# Altium PCB inout.PcbDoc
Units mm, origin at the board's own origin, x right, y up, seen from the top; angles counter-clockwise.
Board outline 65 x 57 mm, 2 copper layers (Top Layer, Bottom Layer); 72 components, 105 nets, 314 pads, 7 vias.
Unrouted connection lines stored in the file: 126.
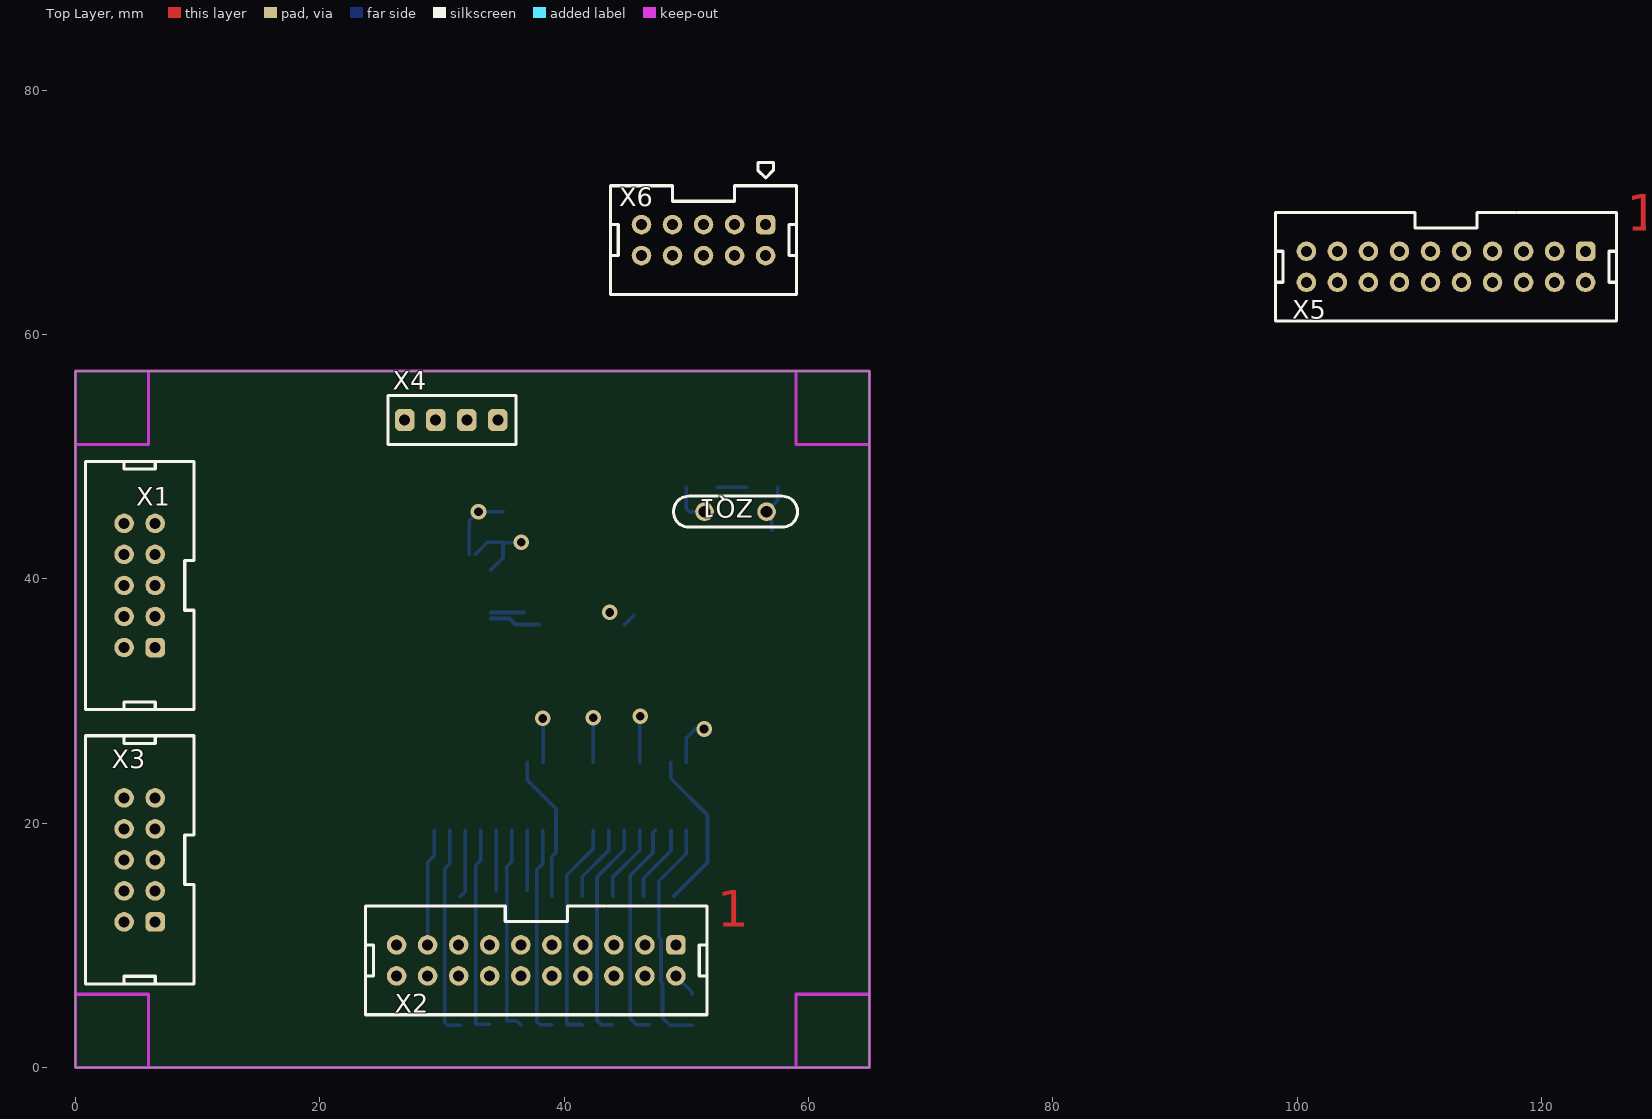
[diagram p0: Top Layer view]
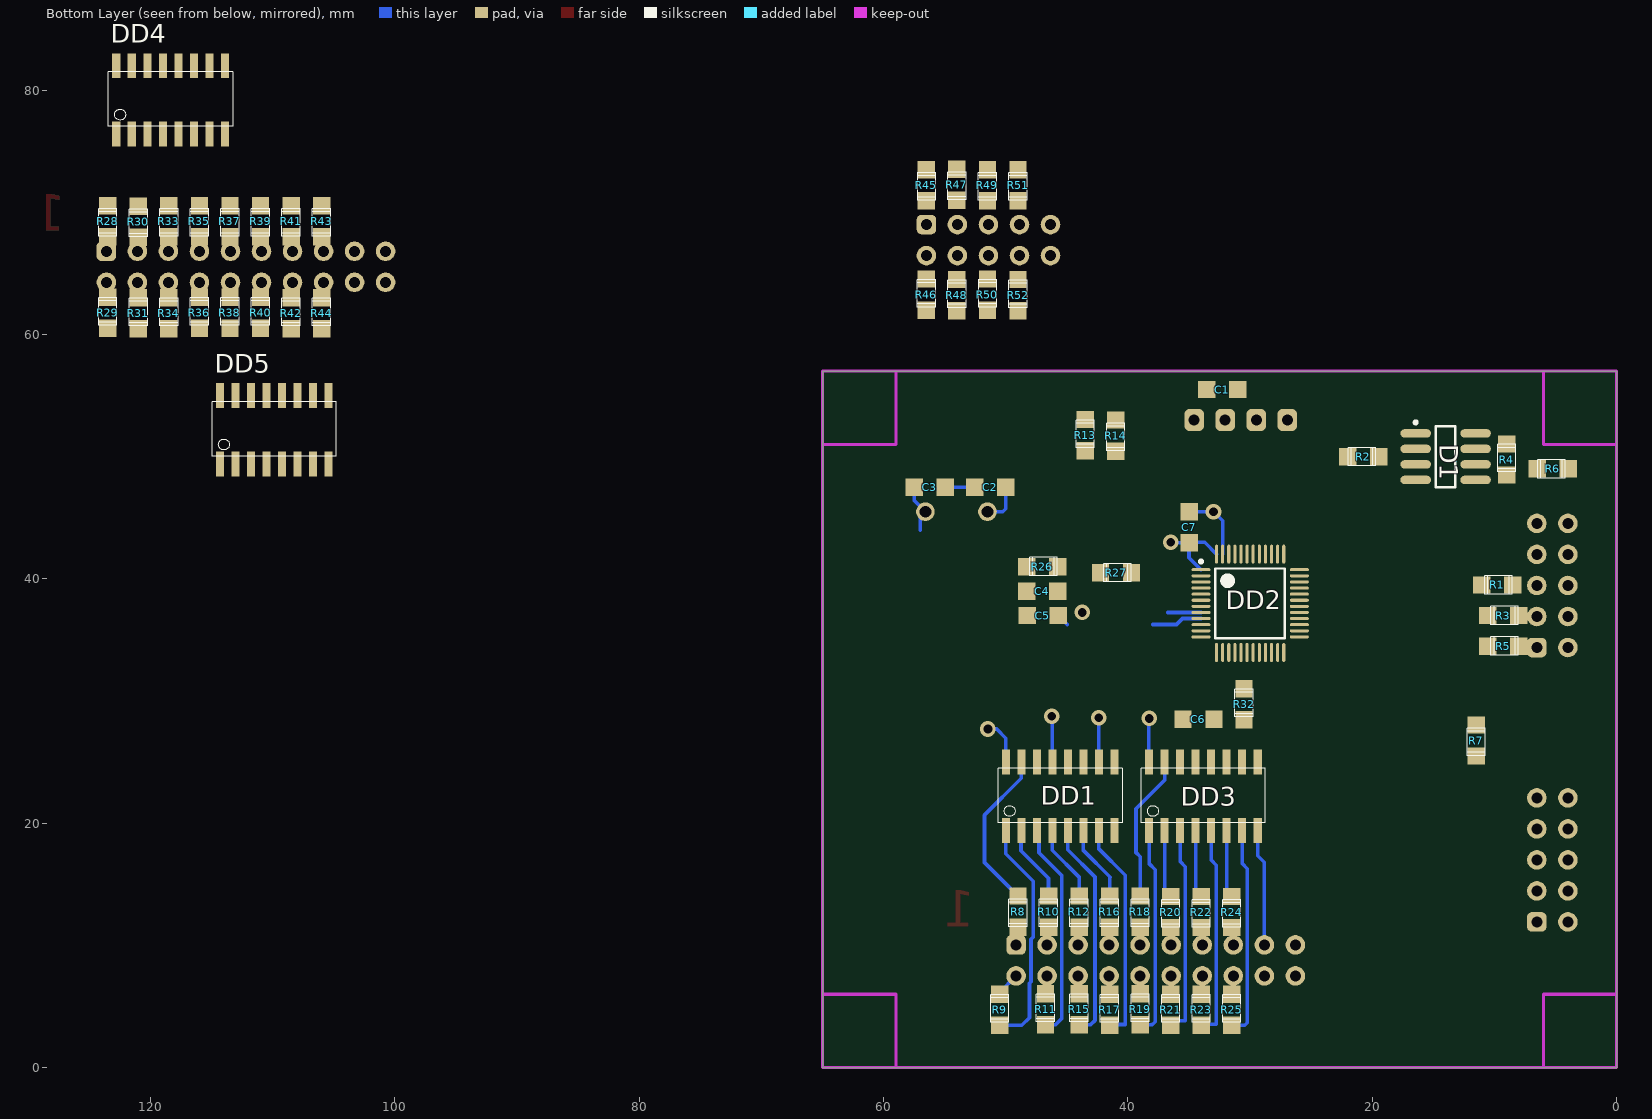
[diagram p1: Bottom Layer view, seen from below]

## Layer stack, top to bottom
Top Layer: signal copper 0.0356
Dielectric: dielectric 0.32, FR-4, Dk 4.8
Bottom Layer: signal copper 0.0356

## Board outline
0,0 65,0 65,57 0,57

## Design rules (kind name [scope] priority, off if disabled: settings)
Clearance [All] p1: gap=0.2
PolygonConnect [All] p1: connectstyle=Relief reliefconductorwidth=0.254 reliefentries=4 polygonreliefangle="90 Angle" airgapwidth=0.254
RoutingVias [All] p1: holewidth=0.711 width=1.27 viastyle="Through Hole" minholewidth=0.711 minwidth=1.27 maxholewidth=0.711 maxwidth=1.27
SolderMaskExpansion [All] p1: expansion=0.102
Width [All] p1: maxlimit=1 minlimit=0.3 preferedwidth=0.3
28 further rules are at their usual default settings.

## Components (designator, comment, footprint, x,y, rotation, side; value= is the part's Value field where it differs from the comment)
C1 "CAP0805" CC0805 33.54,55.5 r180 bottom
C2 "CAP0805" CC0805 50,47.5 r0 bottom
C3 "CAP0805" CC0805 57.5,47.5 r180 bottom
C4 "CAP0805" CC0805 48.29,39 r180 bottom
C5 "CAP0805" CC0805 48.25,37 r180 bottom
C6 "CAP0805" CC0805 35.5,28.5 r180 bottom
C7 "CAP0805" CC0805 35,45.5 r270 bottom
D1 "SN65HVD78" 8S1_M 14,50 r180 bottom
DD1 "74HC595(SOIC)" SO16 50,19.412 r90 bottom
DD2 "STM32F373x(LQFP48)" LQFP48_L 30,38 r180 bottom
DD3 "74HC595(SOIC)" SO16 38.27,19.412 r90 bottom
DD4 "74HC595(SOIC)" SO16 122.81,76.412 r90 bottom
DD5 "74HC595(SOIC)" SO16 114.31,49.412 r90 bottom
R1 "1K 1% 0805(2012)" RC0805 8.5,39.5 r0 bottom
R2 "1K 1% 0805(2012)" RC0805 22,50 r180 bottom
R3 "1K 1% 0805(2012)" RC0805 8,37 r0 bottom
R4 "1K 1% 0805(2012)" RC0805 9,51.04 r270 bottom
R5 "1K 1% 0805(2012)" RC0805 8,34.5 r0 bottom
R6 "1K 1% 0805(2012)" RC0805 6.5,49 r180 bottom
R7 "1K 1% 0805(2012)" RC0805 11.5,25.5 r90 bottom
R8 "1K 1% 0805(2012)" RC0805 49,11.5 r90 bottom
R9 "1K 1% 0805(2012)" RC0805 50.5,6 r270 bottom
R10 "1K 1% 0805(2012)" RC0805 46.5,11.5 r90 bottom
R11 "1K 1% 0805(2012)" RC0805 46.75,6.04 r270 bottom
R12 "1K 1% 0805(2012)" RC0805 44,11.5 r90 bottom
R13 "RES0805" RC0805 43.5,53.04 r270 bottom
R14 "RES0805" RC0805 41,50.46 r90 bottom
R15 "1K 1% 0805(2012)" RC0805 44,6.04 r270 bottom
R16 "1K 1% 0805(2012)" RC0805 41.5,11.5 r90 bottom
R17 "1K 1% 0805(2012)" RC0805 41.5,6 r270 bottom
R18 "1K 1% 0805(2012)" RC0805 39,11.5 r90 bottom
R19 "1K 1% 0805(2012)" RC0805 39,6.04 r270 bottom
R20 "1K 1% 0805(2012)" RC0805 36.5,11.46 r90 bottom
R21 "1K 1% 0805(2012)" RC0805 36.5,6 r270 bottom
R22 "1K 1% 0805(2012)" RC0805 34,11.46 r90 bottom
R23 "1K 1% 0805(2012)" RC0805 34,6 r270 bottom
R24 "1K 1% 0805(2012)" RC0805 31.5,11.46 r90 bottom
R25 "1K 1% 0805(2012)" RC0805 31.5,6 r270 bottom
R26 "RES0805" RC0805 45.75,41 r0 bottom
R27 "RES0805" RC0805 39.71,40.5 r0 bottom
R28 "1K 1% 0805(2012)" RC0805 123.5,68 r90 bottom
R29 "1K 1% 0805(2012)" RC0805 123.5,63.04 r270 bottom
R30 "1K 1% 0805(2012)" RC0805 121,67.96 r90 bottom
R31 "1K 1% 0805(2012)" RC0805 121,63 r270 bottom
R32 "RES0805" RC0805 30.5,31 r270 bottom
R33 "1K 1% 0805(2012)" RC0805 118.5,68 r90 bottom
R34 "1K 1% 0805(2012)" RC0805 118.5,63 r270 bottom
R35 "1K 1% 0805(2012)" RC0805 116,68 r90 bottom
R36 "1K 1% 0805(2012)" RC0805 116,63.04 r270 bottom
R37 "1K 1% 0805(2012)" RC0805 113.5,68 r90 bottom
R38 "1K 1% 0805(2012)" RC0805 113.5,63.04 r270 bottom
R39 "1K 1% 0805(2012)" RC0805 111,68 r90 bottom
R40 "1K 1% 0805(2012)" RC0805 111,63.04 r270 bottom
R41 "1K 1% 0805(2012)" RC0805 108.5,68 r90 bottom
R42 "1K 1% 0805(2012)" RC0805 108.5,63 r270 bottom
R43 "1K 1% 0805(2012)" RC0805 106,68 r90 bottom
R44 "1K 1% 0805(2012)" RC0805 106,63 r270 bottom
R45 "1K 1% 0805(2012)" RC0805 56.5,70.96 r90 bottom
R46 "1K 1% 0805(2012)" RC0805 56.5,64.54 r270 bottom
R47 "1K 1% 0805(2012)" RC0805 54,71 r90 bottom
R48 "1K 1% 0805(2012)" RC0805 54,64.5 r270 bottom
R49 "1K 1% 0805(2012)" RC0805 51.5,70.96 r90 bottom
R50 "1K 1% 0805(2012)" RC0805 51.5,64.54 r270 bottom
R51 "1K 1% 0805(2012)" RC0805 49,70.96 r90 bottom
R52 "1K 1% 0805(2012)" RC0805 49,64.5 r270 bottom
X1 "IDC10" IDC10M 6.54,34.38 r270 top
X2 "idc20" IDC20M 49.16,10.04 r0 top
X3 "IDC10" IDC10M 6.54,11.92 r270 top
X4 "*" 4pin 34.58,53 r180 top
X5 "idc20" IDC20M 123.62,66.815 r0 top
X6 "IDC10" IDC10M 56.5,69 r0 top
ZQ1 "REZONATOR" CRYSTAL_Primary 56.58,45.5 r180 top

## Footprints (in the part's own frame and the unit in brackets; to place one, negate y for a bottom-side part, rotate by r counter-clockwise, add the part's x,y. Pads: shape width x height; smd on the part's side, far side on the other; paste and mask are expansions set on the pad)
4pin [mm]
  rrect50% 1.6x1.8 hole 0.9: 1(0,0) 2(2.54,0) 3(5.08,0) 4(7.62,0)
  silkscreen extent -1.5,-2 9,2
8S1_M [mm] "SOIC, 8-Leads, Body 4.9x3.9mm, Pitch 1.27mm, IPC Low Density"
  oval 2.5x0.7 smd: 1(-2.45,1.905) 2(-2.45,0.635) 3(-2.45,-0.635) 4(-2.45,-1.905) 5(2.45,-1.905) 6(2.45,-0.635) 7(2.45,0.635) 8(2.45,1.905)
  silkscreen extent -2.58,-2.5 0.8,2.93, body extent -2,-2.5 2,2.5, height 1.75
CC0805 [mil]
  rect 56x56 smd: 1(0,0) 2(100,0)
CRYSTAL_Primary [mil]
  round 60 hole 38: 1(0,0) 2(200,0)
  silkscreen extent -100,-50 300,50
IDC10M [mm]
  rrect50% 1.6x1.6 hole 0.9: 1(0,0)
  round 1.6 hole 0.9: 2(0,-2.54) 3(-2.54,0) 4(-2.54,-2.54) 5(-5.08,0) 6(-5.08,-2.54) 7(-7.62,0) 8(-7.62,-2.54) 9(-10.16,0) 10(-10.16,-2.54)
  silkscreen extent -15.24,-5.72 5.08,3.18
IDC20M [mm]
  rrect50% 1.6x1.6 hole 0.9: 1(0,0)
  round 1.6 hole 0.9: 2(0,-2.54) 3(-2.54,0) 4(-2.54,-2.54) 5(-5.08,0) 6(-5.08,-2.54) 7(-7.62,0) 8(-7.62,-2.54) 9(-10.16,0) 10(-10.16,-2.54) 11(-12.7,0) 12(-12.7,-2.54) 13(-15.24,0) 14(-15.24,-2.54) 15(-17.78,0) 16(-17.78,-2.54) 17(-20.32,0) 18(-20.32,-2.54) 19(-22.86,0) 20(-22.86,-2.54)
  silkscreen extent -25.4,-5.71 2.54,3.17
LQFP48_L [mm] "Thin QFP, 48-Leads, Body 7x7mm, Pitch 0.5mm, IPC High Density"
  oval 1.55x0.25 smd: 1(-4.025,2.75) 2(-4.025,2.25) 3(-4.025,1.75) 4(-4.025,1.25) 5(-4.025,0.75) 6(-4.025,0.25) 7(-4.025,-0.25) 8(-4.025,-0.75) 9(-4.025,-1.25) 10(-4.025,-1.75) 11(-4.025,-2.25) 12(-4.025,-2.75) 25(4.025,-2.75) 26(4.025,-2.25) 27(4.025,-1.75) 28(4.025,-1.25) 29(4.025,-0.75) 30(4.025,-0.25) 31(4.025,0.25) 32(4.025,0.75) 33(4.025,1.25) 34(4.025,1.75) 35(4.025,2.25) 36(4.025,2.75)
  oval 0.25x1.55 smd: 13(-2.75,-4.025) 14(-2.25,-4.025) 15(-1.75,-4.025) 16(-1.25,-4.025) 17(-0.75,-4.025) 18(-0.25,-4.025) 19(0.25,-4.025) 20(0.75,-4.025) 21(1.25,-4.025) 22(1.75,-4.025) 23(2.25,-4.025) 24(2.75,-4.025) 37(2.75,4.025) 38(2.25,4.025) 39(1.75,4.025) 40(1.25,4.025) 41(0.75,4.025) 42(0.25,4.025) 43(-0.25,4.025) 44(-0.75,4.025) 45(-1.25,4.025) 46(-1.75,4.025) 47(-2.25,4.025) 48(-2.75,4.025)
  silkscreen extent -4.15,-2.85 2.85,3.55, body extent -3.5,-3.5 3.5,3.5, height 1.6
RC0805 [mil]
  rect 56x56 smd: 1(0,0) 2(100,0)
  silkscreen extent 2,-30 90,30
SO16 [mil]
  rect 80x26 smd: 1(0,0) 2(0,-50) 3(0,-100) 4(0,-150) 5(0,-200) 6(0,-250) 7(0,-300) 8(0,-350) 9(220,-350) 10(220,-300) 11(220,-250) 12(220,-200) 13(220,-150) 14(220,-100) 15(220,-50) 16(220,0)
  silkscreen extent 25,-375 200,25

## Part data
R1 R2 R3 R4 R5 R6 R7 R8 R9 R10 R11 R12 R15 R16 R17 R18 R19 R20 R21 R22 R23 R24 R25 R28 R29 R30 R31 R33 R34 R35 R36 R37 R38 R39 R40 R41 R42 R43 R44 R45 R46 R47 R48 R49 R50 R51 R52: library part RES0805, "RES0805"
X4: library part 4pin

## Via types
v1: diameter 1.27, hole 0.711, Top Layer to Bottom Layer, 7 vias

## Nets (pads, with @x,y where several pads share a name; then routed paths per layer and width w, separated by ;. In a path a pad name is that pad's centre, name@x,y a point inside that pad or via, vN(x,y) a via of type N, cw(c..) or ccw(c..) an arc to the next point about the centre after c; other vN are vias at no path point)
0V: C1.2 C2.2 C3.2 C4.1 C5.1 C6.1 C7.1 D1.5 DD1.8 DD1.13 DD2.8 DD2.23 DD2.47 DD3.8 DD3.13 DD4.8 DD4.13 DD5.8 DD5.13 R6.2 R13.2 X1.2 X1.4 X1.6 X1.8 X1.9 X1.10 X2.17 X2.18 X2.19 X2.20 X3.2 X3.4 X3.6 X3.8 X3.9 X3.10 X4.3 X5.17 X5.18 X5.19 X5.20 X6.9 X6.10 | length 24.8
  Bottom Layer w0.3: X2.17 28.84,16.8 29.38,17.34 DD3.8 ; DD2.47 32.25,44.75 v1(33,45.5) C7.1 ; DD2.8 36,37.25 ; 36,37.25 35.75,37.25 36.75,37.25 ; DD1.13 46.19,28.69 v1(46.25,28.75) ; C2.2 C3.2
  other v1: 43.75,37.25
3P3V: C1.1 C7.2 D1.8 DD1.10 DD1.16 DD2.1 DD2.17 DD2.48 DD3.10 DD3.16 DD4.10 DD4.16 DD5.10 DD5.16 R1.1 R2.1 R7.2 R14.2 R26.2 R32.1 X4.1 | length 18
  Bottom Layer w0.3: DD2.48 33.725,43 34.96,43 C7.2 ; DD2.1 35,41.725 C7.2 ; v1(36.5,43) 36.46,42.96 C7.2 ; v1(38.25,28.577) 38.303,28.524 38.303,25.033 DD3.16 ; v1@42.25,28.75 v1(42.38,28.62) DD1.10 ; DD1.16 50,26.962 50.749,27.711 v1(51.46,27.711)
3P3VA: C5.2 C6.2 DD2.9 DD2.24 DD2.25 R32.2 | length 5.2
  Bottom Layer w0.3: DD2.9 35.543,36.75 36.028,36.265 37.975,36.265 ; 44.975,36.265 C5.2
A_485: R5.1 X1.1 X3.1
B_485: R3.1 X1.3 X3.3
NetC2_1: C2.1 DD2.5 ZQ1.2 | length 3.4
  Bottom Layer w0.3: C2.1 50,45.75 50.25,45.5 ZQ1.2
NetC3_1: C3.1 R27.2 ZQ1.1 | length 4.1
  Bottom Layer w0.3: 57,44 57,45.08 ZQ1.1 57.5,46.42 C3.1
NetC4_2: C4.2 DD2.7 R26.1
NetD1_6: D1.6 R4.2 R5.2 R6.1
NetD1_7: D1.7 R1.2 R3.2 R4.1
NetDD1_9: DD1.9 DD3.14
NetDD2_6: DD2.6 R27.1
NetDD2_44: DD2.44 R13.1 R14.1
NetDD3_9: DD3.9 DD4.14
NetDD4_9: DD4.9 DD5.14
NetR8_1: R8.1 X2.1
NetR9_1: R9.1 X2.2 | length 2.1
  Bottom Layer w0.3: X2.2 50.5,6.16 R9.1
NetR10_1: R10.1 X2.3
NetR11_1: R11.1 X2.4
NetR12_1: R12.1 X2.5
NetR15_1: R15.1 X2.6
NetR16_1: R16.1 X2.7
NetR17_1: R17.1 X2.8
NetR18_1: R18.1 X2.9
NetR19_1: R19.1 X2.10
NetR20_1: R20.1 X2.11
NetR21_1: R21.1 X2.12
NetR22_1: R22.1 X2.13
NetR23_1: R23.1 X2.14
NetR24_1: R24.1 X2.15
NetR25_1: R25.1 X2.16
NetR28_1: R28.1 X5.1
NetR29_1: R29.1 X5.2
NetR30_1: R30.1 X5.3
NetR31_1: R31.1 X5.4
NetR33_1: R33.1 X5.5
NetR34_1: R34.1 X5.6
NetR35_1: R35.1 X5.7
NetR36_1: R36.1 X5.8
NetR37_1: R37.1 X5.9
NetR38_1: R38.1 X5.10
NetR39_1: R39.1 X5.11
NetR40_1: R40.1 X5.12
NetR41_1: R41.1 X5.13
NetR42_1: R42.1 X5.14
NetR43_1: R43.1 X5.15
NetR44_1: R44.1 X5.16
NetR45_1: R45.1 X6.1
NetR46_1: R46.1 X6.2
NetR47_1: R47.1 X6.3
NetR48_1: R48.1 X6.4
NetR49_1: R49.1 X6.5
NetR50_1: R50.1 X6.6
NetR51_1: R51.1 X6.7
NetR52_1: R52.1 X6.8
PB1: DD1.15 R8.2 | length 13.4
  Bottom Layer w0.3: DD1.15 48.73,23.685 51.75,20.665 51.75,16.79 R8.2
PB2: DD1.1 R9.2 | length 19.1
  Bottom Layer w0.3: DD1.1 50,17.5 47.75,15.25 47.75,10.689 47.939,10.5 47.939,7.019 48.061,6.896 48.061,4.085 48.686,3.46 R9.2
PB3: DD1.2 R10.2 | length 6.3
  Bottom Layer w0.3: R10.2 46.5,15.487 48.75,17.737 48.75,19.392 DD1.2
PB4: DD1.3 R11.2 | length 18
  Bottom Layer w0.3: R11.2@47,3.5 45.928,3.5 45.415,4.013 45.415,15.723 47.281,17.589 47.281,19.233 DD1.3
PB5: DD1.4 R12.2 | length 6.3
  Bottom Layer w0.3: R12.2 44,15.603 46.19,17.793 DD1.4
PB6: DD1.5 R15.2 | length 17.9
  Bottom Layer w0.3: R15.2 43.058,3.5 42.697,3.861 42.697,15.596 44.92,17.818 DD1.5
PB7: DD1.6 R16.2 | length 6.3
  Bottom Layer w0.3: R16.2 41.5,15.523 41.453,15.57 43.65,17.767 DD1.6
PB8: DD1.7 R17.2 | length 18.1
  Bottom Layer w0.3: R17.2 41.429,3.531 40.234,3.531 40.234,15.748 42.38,17.894 DD1.7
PB9: DD3.15 R18.2 | length 12.1
  Bottom Layer w0.3: DD3.15 37,23.528 39.345,21.184 39.345,17.602 39,17.258 R18.2
PB10: DD3.1 R19.2 | length 17.2
  Bottom Layer w0.3: DD3.1 38.27,16.696 37.77,16.195 37.77,3.759 38.029,3.5 R19.2
PB11: DD3.2 R20.2 | length 4.9
  Bottom Layer w0.3: R20.2@37,14.5 DD3.2
PB12: DD3.3 R21.2 | length 17.1
  Bottom Layer w0.3: DD3.3 35.73,16.858 35.306,16.434 35.306,3.835 36.125,3.835 R21.2
PB13: DD3.4 R22.2 | length 5
  Bottom Layer w0.3: R22.2@34.46,14.46 DD3.4
PB14: DD3.5 R23.2 | length 17.2
  Bottom Layer w0.3: DD3.5 33.19,16.985 32.77,16.565 32.77,3.552 R23.2@33.908,3.552
PB15: DD3.6 R24.2 | length 5.6
  Bottom Layer w0.3: R24.2 31.92,14.42 DD3.6
PB16: DD3.7 R25.2 | length 17.3
  Bottom Layer w0.3: DD3.7 30.65,16.696 30.23,16.276 30.23,3.662 30.432,3.46 R25.2
PC1: DD4.15 R28.2
PC2: DD4.1 R29.2
PC3: DD4.2 R30.2
PC4: DD4.3 R31.2
PC5: DD4.4 R33.2
PC6: DD4.5 R34.2
PC7: DD4.6 R35.2
PC8: DD4.7 R36.2
PC9: DD5.15 R37.2
PC10: DD5.1 R38.2
PC11: DD5.2 R39.2
PC12: DD5.3 R40.2
PC13: DD5.4 R41.2
PC14: DD5.5 R42.2
PC15: DD5.6 R43.2
PC16: DD5.7 R44.2
PD1: R45.2
PD2: R46.2
PD3: R47.2
PD4: R48.2
PD5: R49.2
PD6: R50.2
PD7: R51.2
PD8: R52.2
SPI3_MISO: DD2.12
SPI3_MOSI: DD1.14 DD2.13
SPI3_SCK: DD1.11 DD2.11 DD3.11 DD4.11 DD5.11
SPI_LOCK: DD1.12 DD2.10 DD3.12 DD4.12 DD5.12
SWCLK: DD2.37 X4.2
SWDIO: DD2.34 X4.4
TTL_TX_EN: D1.2 D1.3 DD2.38 R2.2
USART2_RX: D1.4 DD2.40
USART2_TX: D1.1 DD2.39
V3P3D: R7.1 X1.5 X1.7 X3.5 X3.7
pads on no net: DD2.2 DD2.3 DD2.4 DD2.14 DD2.15 DD2.16 DD2.18 DD2.19 DD2.20 DD2.21 DD2.22 DD2.26 DD2.27 DD2.28 DD2.29 DD2.30 DD2.31 DD2.32 DD2.33 DD2.35 DD2.36 DD2.41 DD2.42 DD2.43 DD2.45 DD2.46 DD5.9

## Keep-outs
Keep-Out Layer:
  lines w0.254: 0,6 6,6 6,0 ; 0,51 6,51 6,57 ; 59,0 59,6 65,6 ; 59,57 59,51 65,51 ; 0,0 0,57 65,57 65,0 0,0

## Text inside footprints (layer, text, board x,y; h text height)
X2: Top Layer "1" at 52.54,11.525 h3
X5: Top Layer "1" at 127,68.5 h3